# Altium PCB PCB1.PcbDoc (part 1 of 3)
Units mil, origin at the board's own origin, x right, y up, seen from the top; angles counter-clockwise.
Board outline 3543.31 x 5118.11 mil, 2 copper layers (Top Layer, Bottom Layer); 56 components, 55 nets, 300 pads, 86 vias.
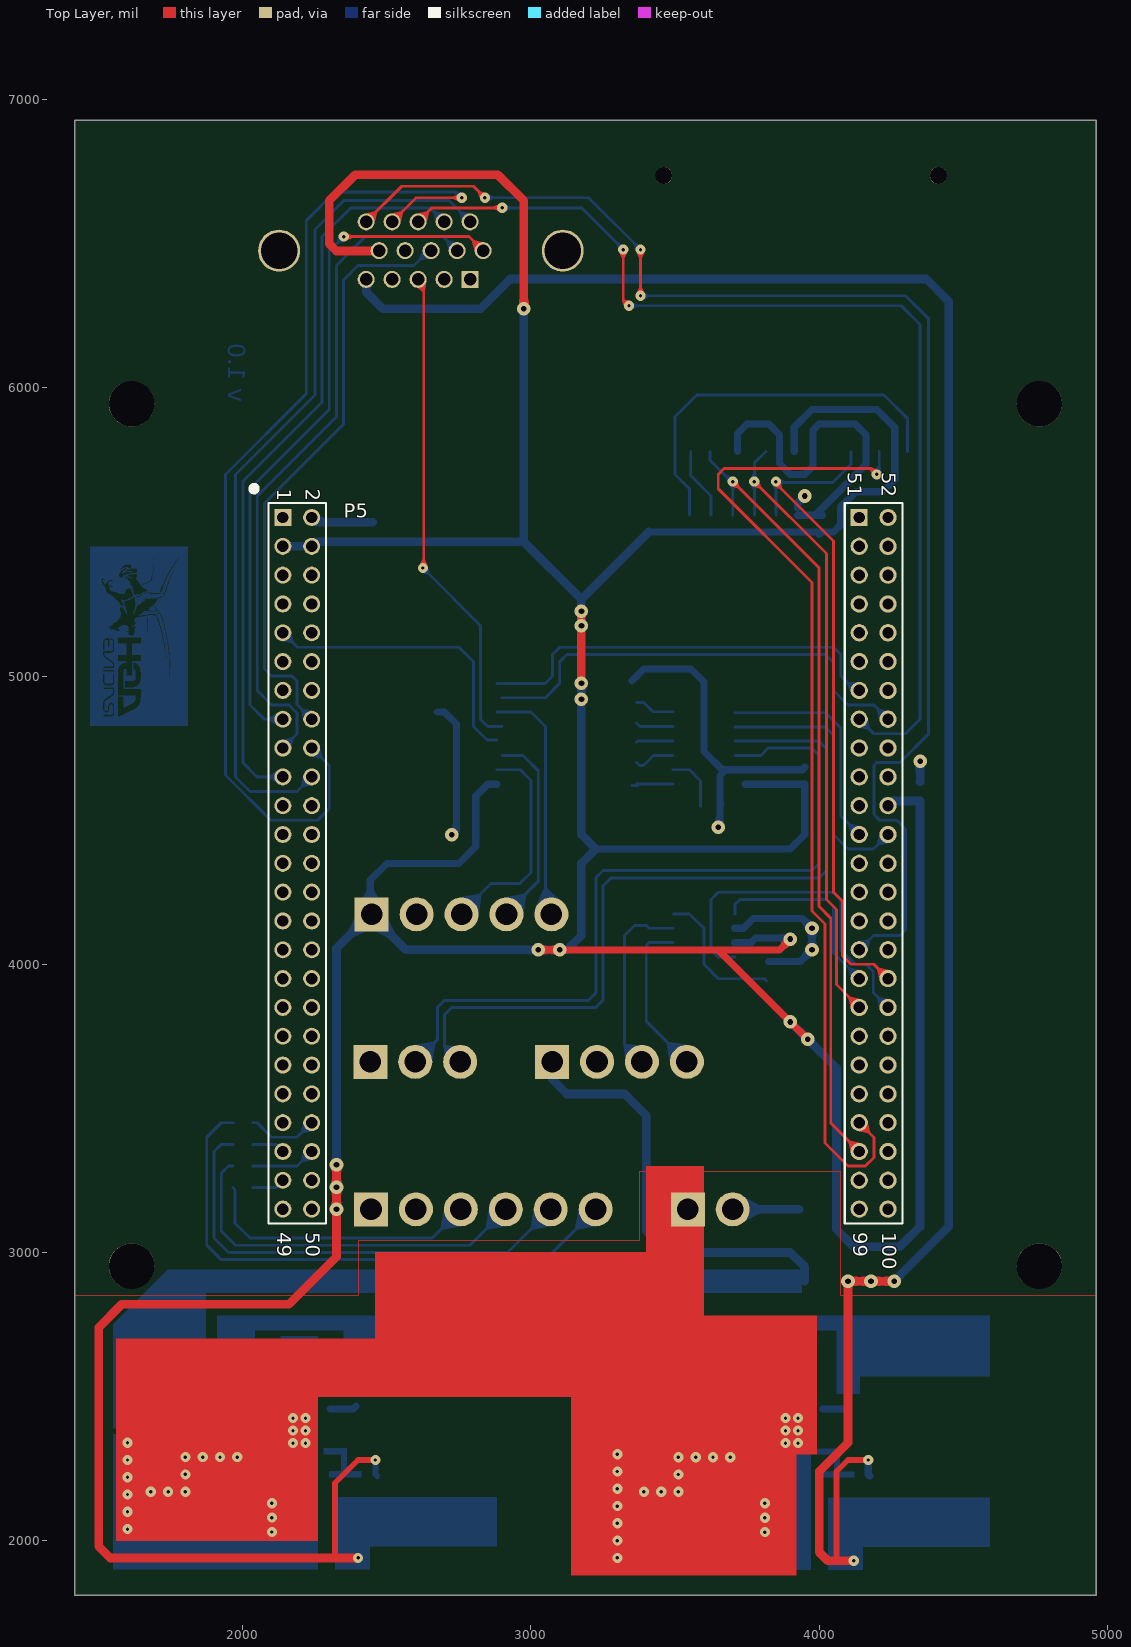
[diagram p0: Top Layer view]
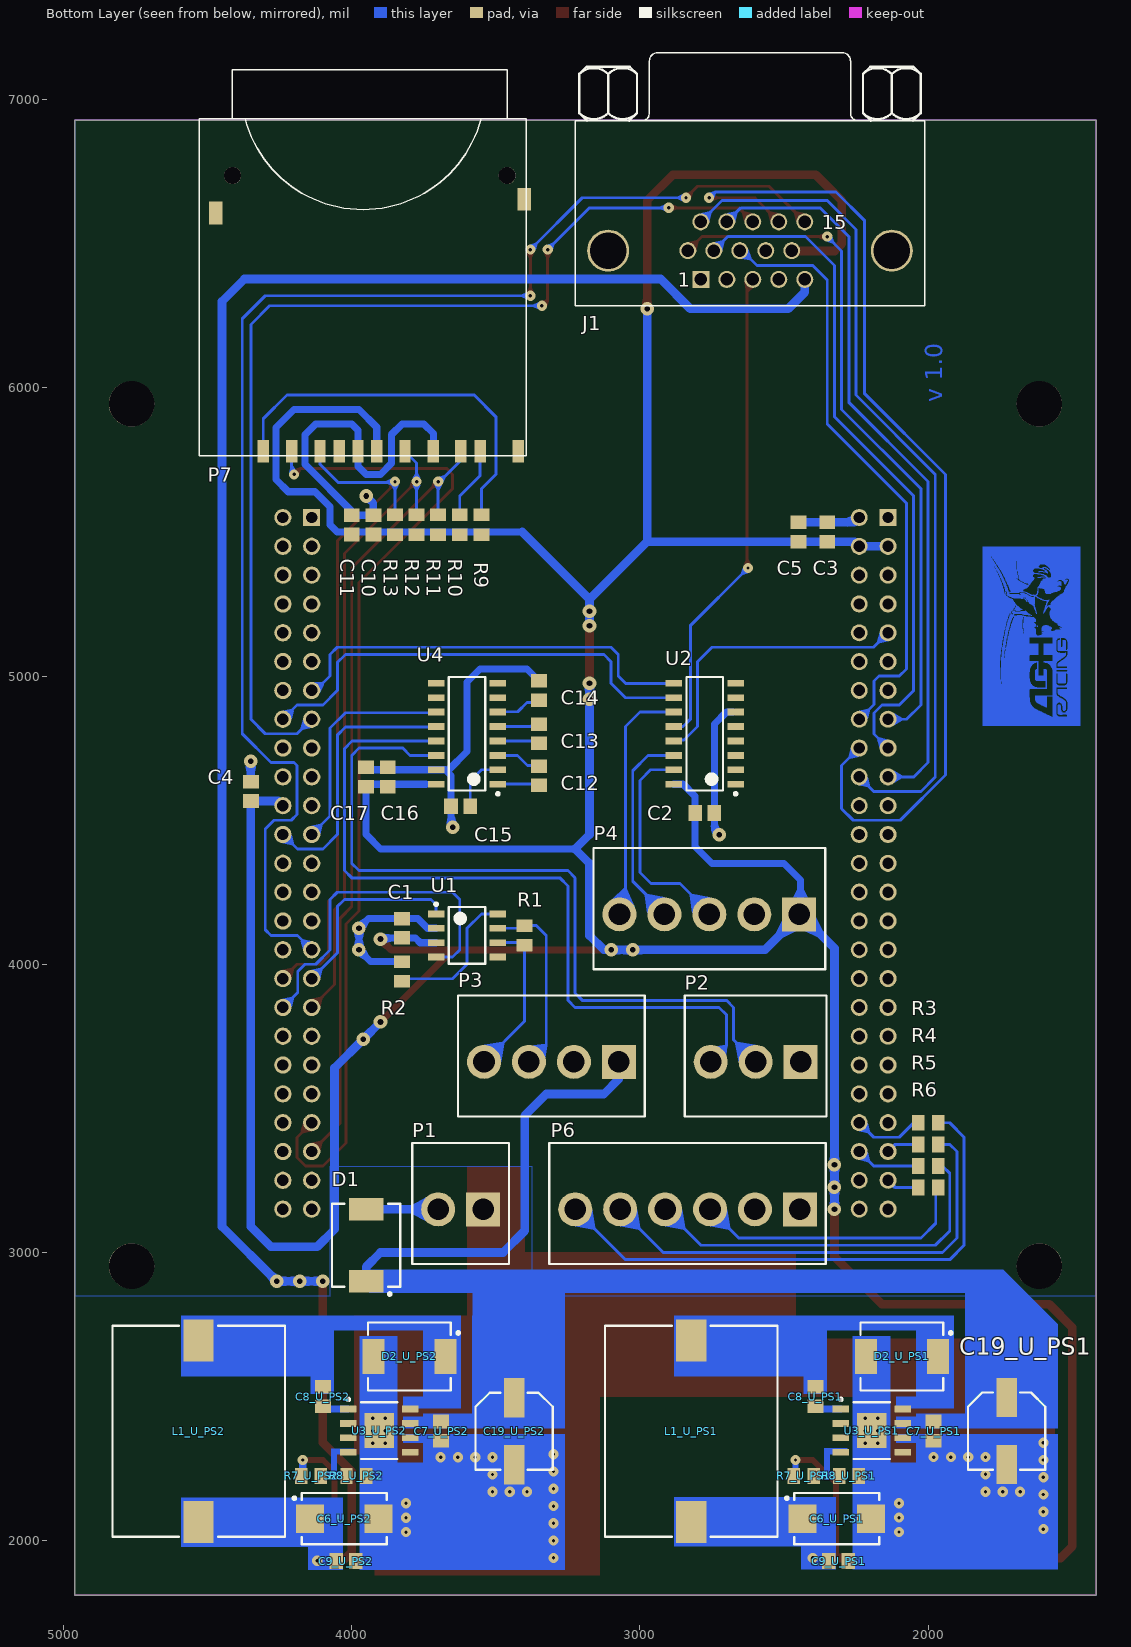
[diagram p1: Bottom Layer view, seen from below]
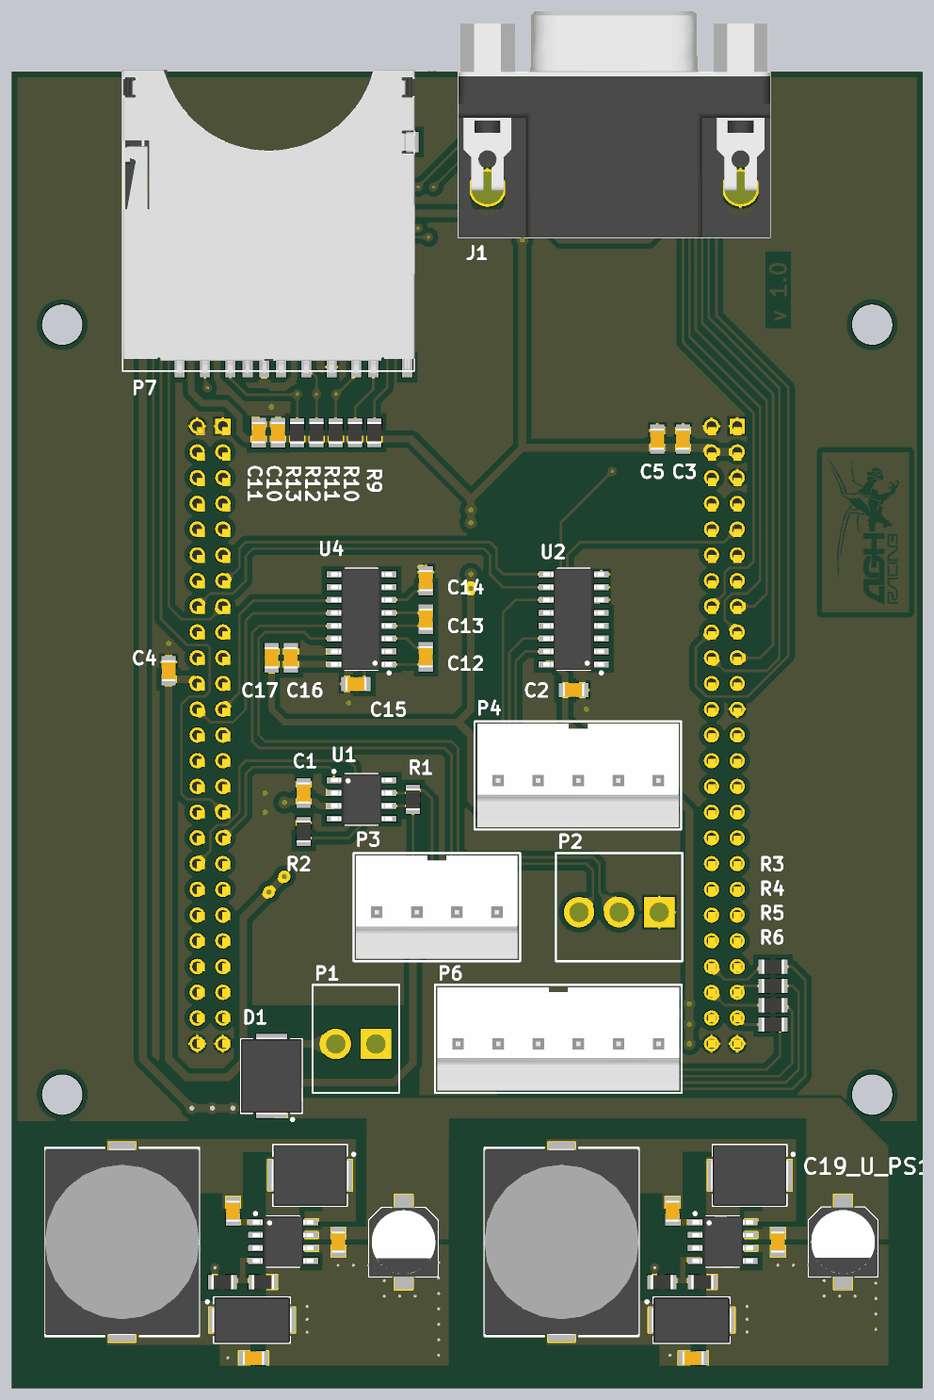
[diagram p4: 3D render of the assembled board from below, using the file's embedded part models]

## Layer stack, top to bottom
Top Solder: solder mask 0.4, Solder Resist, Dk 3.5
Top Layer: signal copper 1.4
Dielectric 1: dielectric 12.6, FR-4, Dk 4.8
Bottom Layer: signal copper 1.4
Bottom Solder: solder mask 0.4, Solder Resist, Dk 3.5

## Board outline
1417.32,1811.02 4960.63,1811.02 4960.63,6929.13 1417.32,6929.13

## Design rules (kind name [scope] priority, off if disabled: settings)
Clearance [All] p1: gap=10 except(8: SMDPad-SMDPad; 20: Arc-Poly Track-Poly SMDPad-Poly THPad-Poly Via-Poly Fill-Poly Poly-Poly)
HoleSize [All] p1: absolutevalues=TRUE maxlimit=196.85 minlimit=11.81 maxpercent=80.000 minpercent=20.000
PlaneClearance [InNet('GND')] p1: clearance=20
PolygonConnect PolygonConnect_1 [IsVia AND InNet('GND')] p1: connectstyle=Direct reliefconductorwidth=10 reliefentries=4 polygonreliefangle="90 Angle" airgapwidth=10
PolygonConnect [All] p2: connectstyle=Relief reliefconductorwidth=10 reliefentries=4 polygonreliefangle="90 Angle" airgapwidth=10
RoomDefinition U_CAN_Module [InComponentClass('U_CAN_Module')] p1: confinementstyle=ConfineIn formatcopy=TRUE lockcomponents=FALSE outline 3326.77,3900 3326.77,4330.71 4040.71,4330.71 4040.71,3900
RoomDefinition U_PS2 [InComponentClass('U_PS2')] p2: confinementstyle=ConfineIn formatcopy=TRUE lockcomponents=FALSE outline 4900,1880 3260,1880 3260,2780 4900,2780
RoomDefinition U_PS1 [InComponentClass('U_PS1')] p3: confinementstyle=ConfineIn formatcopy=TRUE lockcomponents=FALSE outline 3140,1880 1540,1880 1540,2780 3140,2780
RoomDefinition U_UART_TO_RS232 [InComponentClass('U_UART_TO_RS232')] p4: confinementstyle=ConfineIn formatcopy=TRUE lockcomponents=FALSE outline 3129.92,5039.37 4015.75,5039.37 4015.75,4325.43 3129.92,4325.43
RoomDefinition U_SD_Card_Adapter [InComponentClass('U_SD_Card_Adapter')] p5: confinementstyle=ConfineIn formatcopy=TRUE lockcomponents=FALSE outline 3267.72,7204.72 4566.93,7204.72 4566.93,5275.59 3267.72,5275.59
RoomDefinition U_Discovery [InComponentClass('U_Discovery')] p6: confinementstyle=ConfineIn formatcopy=TRUE lockcomponents=FALSE outline 1811.02,2834.65 4566.93,2834.65 4566.93,6968.5 1811.02,6968.5
RoutingVias [All] p1: holewidth=28 width=50 viastyle="Through Hole" minholewidth=11.81 minwidth=31.5 maxholewidth=196.85 maxwidth=50 useviatemplates=TRUE viatemplateguid#1={49B0258C-F5A5-454E-AF11-5DAC3A63D32B} viatemplateguid#2={72FB6E34-B7B5-406E-8E23-2B7222EC5477} viatemplateguid#3={637E6A93-6537-4104-A704-FEC00B93304C} viatemplatename#1=v90h30m0mx0 viatemplatename#2=v120h50 viatemplatename#3=v90h30
SolderMaskExpansion [All] p1: expansion=4
Width "Schematic Width Constraint_1" [InNet('NetD1_1')] p1: maxlimit=30 minlimit=20 preferedwidth=25 minimp=50.000000 maximp=50.000000 favimp=50.000000
Width "Schematic Width Constraint" [InNetClass('PowerNets')] p2: maxlimit=30 minlimit=20 preferedwidth=25 minimp=50.000000 maximp=50.000000 favimp=50.000000
Width [InNetClass('OTHERS')] p3: maxlimit=10 minlimit=10 preferedwidth=10
Width Signal_Width [InNetClass('SIGNALS')] p4: maxlimit=10 minlimit=10 preferedwidth=10
Width Power_Width [InNetClass('POWER')] p5: maxlimit=30 minlimit=20 preferedwidth=25 minimp=50.000000 maximp=50.000000 favimp=50.000000
28 further rules are at their usual default settings.

## Classes and differential pairs
net class CTRL_LED[1..3]: CTRL_LED1 CTRL_LED2 CTRL_LED3
net class PowerNets: +3V3 +5V +12V GND NetC8_U_PS1_1 NetC8_U_PS1_2 NetC8_U_PS2_1 NetC8_U_PS2_2 NetR7_U_PS1_1 NetR7_U_PS2_1
channel class PS: U_PS1 U_PS2
component class U_PS2: C6_U_PS2 C7_U_PS2 C8_U_PS2 C9_U_PS2 C19_U_PS2 D2_U_PS2 L1_U_PS2 R7_U_PS2 R8_U_PS2 U3_U_PS2
component class U_PS1: C6_U_PS1 C7_U_PS1 C8_U_PS1 C9_U_PS1 C19_U_PS1 D2_U_PS1 L1_U_PS1 R7_U_PS1 R8_U_PS1 U3_U_PS1
component class U_UART_TO_RS232: C12 C13 C14 C15 C16 C17 U4
component class U_SD_Card_Adapter: C10 C11 P7 R9 R10 R11 R12 R13
component class U_Discovery: C2 C3 C4 C5 P5 P6 R3 R4 R5 R6 U2
component class U_CAN_Module: C1 R1 R2 U1
component class Main: D1 J1 P1 P2 P3 P4

## Components (designator, comment, footprint, x,y, rotation, side; value= is the part's Value field where it differs from the comment)
C1 "Cap" CAP_0805_IPC_MD 3825,4125 r270 bottom
C2 "Cap" CAP_0805_IPC_MD 2775,4525 r0 bottom
C3 "Cap" CAP_0805_IPC_MD 2350,5500 r270 bottom
C4 "Cap" CAP_0805_IPC_MD 4350,4600 r270 bottom
C5 "Cap" CAP_0805_IPC_MD 2450,5500 r270 bottom
C6_U_PS1 "Cap Pol" CAP_SMD_D_IPC_MD 2316.81,2076.53 r180 bottom (schematic designator C6)
C6_U_PS2 "Cap Pol" CAP_SMD_D_IPC_MD 4026.02,2076.53 r180 bottom (schematic designator C6)
C7_U_PS1 "Cap" CAP_0805_IPC_MD 1980.79,2380 r90 bottom (schematic designator C7)
C7_U_PS2 "Cap" CAP_0805_IPC_MD 3690,2380 r90 bottom (schematic designator C7)
C8_U_PS1 "Cap" CAP_0805_IPC_MD 2390.79,2500 r90 bottom (schematic designator C8)
C8_U_PS2 "Cap" CAP_0805_IPC_MD 4100,2500 r90 bottom (schematic designator C8)
C9_U_PS1 "Cap" CAP_0805_IPC_MD 2310.79,1928.72 r0 bottom (schematic designator C9)
C9_U_PS2 "Cap" CAP_0805_IPC_MD 4020,1928.72 r0 bottom (schematic designator C9)
C10 "Cap" CAP_0805_IPC_MD 3925,5525 r270 bottom
C11 "Cap" CAP_0805_IPC_MD 4000,5525 r270 bottom
C12 "Cap" CAP_0805_IPC_MD 3350,4654.16 r270 bottom
C13 "Cap" CAP_0805_IPC_MD 3350,4800 r270 bottom
C14 "Cap" CAP_0805_IPC_MD 3350,4950 r270 bottom
C15 "Cap" CAP_0805_IPC_MD 3622.05,4548.43 r180 bottom
C16 "Cap" CAP_0805_IPC_MD 3875,4650 r270 bottom
C17 "Cap" CAP_0805_IPC_MD 3950,4650 r270 bottom
C19_U_PS1 "Cap Pol" CAPAE7866X80M 1727.43,2380 r270 bottom (schematic designator C19)
C19_U_PS2 "Cap Pol" CAPAE7866X80M 3436.64,2379.61 r270 bottom (schematic designator C19)
D1 "SK33" DO214AB_IPC_MD 3950,3025 r270 bottom
D2_U_PS1 "SK33" DO214AB_IPC_MD 2090.79,2639.07 r180 bottom (schematic designator D2)
D2_U_PS2 "SK33" DO214AB_IPC_MD 3800,2639.07 r180 bottom (schematic designator D2)
J1 "D-SUB 15" Dsub-3H15 2618.11,6476.38 r180 bottom
L1_U_PS1 "Inductor" IND_DL50_IPC_MD 2821.9,2380 r270 bottom (schematic designator L1)
L1_U_PS2 "Inductor" IND_DL50_IPC_MD 4531.11,2380 r270 bottom (schematic designator L1)
P1 "POWER" HDR_1x2_3_94_LOCKING 3622.05,3149.61 r0 bottom
P2 "EMU" HDR_1x3_3_94_LOCKING 2598.43,3661.42 r0 bottom locked
P3 "CAN" HDR_1x4_3_94_LOCKING 3307.09,3661.42 r0 bottom locked
P4 "STEERING WHEEL" HDR_1x5_3_94_LOCKING 3070.87,4173.23 r0 bottom
P5 "STM32F4DISCOVERY" DISCOVERY_F4 3188.98,4350.39 r0 top locked
P6 "CONTROL LEDS" HDR_1x6_3_94_LOCKING 2834.65,3149.61 r0 bottom locked
P7 "SD Card Connector" 693061010911 3937.01,6258.43 r0 bottom locked
R1 "Res" RES_0805_IPC_MD 3400,4100 r90 bottom
R2 "Res" RES_0805_IPC_MD 3825,3975 r270 bottom
R3 "Res" RES_0805_IPC_MD 2000,3450 r180 bottom
R4 "Res" RES_0805_IPC_MD 2000,3375 r180 bottom
R5 "Res" RES_0805_IPC_MD 2000,3300 r180 bottom
R6 "Res" RES_0805_IPC_MD 2000,3225 r180 bottom
R7_U_PS1 "Res" RES_0805_IPC_MD 2431.97,2224.33 r0 bottom (schematic designator R7)
R7_U_PS2 "Res" RES_0805_IPC_MD 4141.18,2224.33 r0 bottom (schematic designator R7)
R8_U_PS1 "Res" RES_0805_IPC_MD 2274.49,2224.33 r0 bottom (schematic designator R8)
R8_U_PS2 "Res" RES_0805_IPC_MD 3983.7,2224.33 r0 bottom (schematic designator R8)
R9 "Res" RES_0805_IPC_MD 3550,5525 r270 bottom
R10 "Res" RES_0805_IPC_MD 3625,5525 r270 bottom
R11 "Res" RES_0805_IPC_MD 3700,5525 r270 bottom
R12 "Res" RES_0805_IPC_MD 3775,5525 r270 bottom
R13 "Res" RES_0805_IPC_MD 3850,5525 r270 bottom
U1 "SN65HVD230D" SOIC_8_IPC_MD 3600,4100 r180 bottom
U2 "CD74HC4052" SO_16_IPC_MD 2775,4800 r0 bottom
U3_U_PS1 "TPS5430" SOIC_8_THERMAL_PAD_IPC_MD 2195.75,2381.81 r180 bottom (schematic designator U3)
U3_U_PS2 "TPS5430" SOIC_8_THERMAL_PAD_IPC_MD 3904.96,2381.81 r180 bottom (schematic designator U3)
U4 "MAX232IDW" SO_16_IPC_MD 3600,4800 r0 bottom

## Footprints (in the part's own frame and the unit in brackets; to place one, negate y for a bottom-side part, rotate by r counter-clockwise, add the part's x,y. Pads: shape width x height; smd on the part's side, far side on the other; paste and mask are expansions set on the pad)
693061010911 [mm] "WR-CRD SD_Push and Push_with card detection_9 pins"
  rect 1x2 smd: 1(6.9,12.155) 2(4.4,12.155) 3(1.05,12.155) 4(-0.6,12.155) 5(-3.1,12.155) 6(-5.6,12.155) 7(-8.02,12.155) 8(-9.72,12.155) 9(9.4,12.155) CD(2.7,12.155) WP(-13.07,12.155)
  rect 1.2x2 smd: Z1(-13.6,-10.055) Z2(13.6,-8.855)
  round 1.5 hole 1.5 unplated: ""(-12.1,-12.155) ""(12.1,-12.155)
  silkscreen extent -13.77,-21.5 15.03,12.54, body extent -13.8,-17.16 15,12.74, height 3.06
CAP_0805_IPC_MD [mm] "Chip Capacitor, 2-Leads, 0805, SAMSUNG, IPC Medium Density"
  rect 1.2x1.4 smd: 1(-0.85,0) 2(0.85,0)
  body extent -1.05,-0.67 1.05,0.67, height 1.35
CAP_SMD_D_IPC_MD [mm] "Capacitor SMD D, IPC Medium Density"
  rect 2.45x2.5 smd: 1(-3.025,0) 2(3.025,0)
  silkscreen extent -4.53,-2.25 3.75,2.25, body extent -3.97,-2.25 3.97,2.25, height 3.1
CAPAE7866X80M [mm] "Aluminum Electrolytic Capacitor, Body 6,60x6,60x8,00mm, IPC Low Density"
  rect 3.45x1.8 smd: 1(-2.95,0) 2(2.95,0)
  silkscreen extent -3.4,-3.4 3.4,3.4, body extent -3.9,-3.4 3.9,3.4, height 8
DISCOVERY_F4 [mm] "Connector; Header; 25x2 Position"
  rect 1.5x1.5 hole 1: 1(-26.67,30.48) 51(24.13,30.48)
  round 1.5 hole 1: 2(-24.13,30.48) 3(-26.67,27.94) 4(-24.13,27.94) 5(-26.67,25.4) 6(-24.13,25.4) 7(-26.67,22.86) 8(-24.13,22.86) 9(-26.67,20.32) 10(-24.13,20.32) 11(-26.67,17.78) 12(-24.13,17.78) 13(-26.67,15.24) 14(-24.13,15.24) 15(-26.67,12.7) 16(-24.13,12.7) 17(-26.67,10.16) 18(-24.13,10.16) 19(-26.67,7.62) 20(-24.13,7.62) 21(-26.67,5.08) 22(-24.13,5.08) 23(-26.67,2.54) 24(-24.13,2.54) 25(-26.67,0) 26(-24.13,0) 27(-26.67,-2.54) 28(-24.13,-2.54) 29(-26.67,-5.08) 30(-24.13,-5.08) 31(-26.67,-7.62) 32(-24.13,-7.62) 33(-26.67,-10.16) 34(-24.13,-10.16) 35(-26.67,-12.7) 36(-24.13,-12.7) 37(-26.67,-15.24) 38(-24.13,-15.24) 39(-26.67,-17.78) 40(-24.13,-17.78) 41(-26.67,-20.32) 42(-24.13,-20.32) 43(-26.67,-22.86) 44(-24.13,-22.86) 45(-26.67,-25.4) 46(-24.13,-25.4) 47(-26.67,-27.94) 48(-24.13,-27.94) 49(-26.67,-30.48) 50(-24.13,-30.48) 52(26.67,30.48)
  round 1.524 hole 1: 53(24.13,27.94) 54(26.67,27.94) 55(24.13,25.4) 56(26.67,25.4) 57(24.13,22.86) 58(26.67,22.86) 59(24.13,20.32) 60(26.67,20.32) 61(24.13,17.78) 62(26.67,17.78) 63(24.13,15.24) 64(26.67,15.24) 65(24.13,12.7) 66(26.67,12.7) 67(24.13,10.16) 68(26.67,10.16) 69(24.13,7.62) 70(26.67,7.62) 71(24.13,5.08) 72(26.67,5.08) 73(24.13,2.54) 74(26.67,2.54) 75(24.13,0) 76(26.67,0) 77(24.13,-2.54) 78(26.67,-2.54) 79(24.13,-5.08) 80(26.67,-5.08) 81(24.13,-7.62) 82(26.67,-7.62) 83(24.13,-10.16) 84(26.67,-10.16) 85(24.13,-12.7) 86(26.67,-12.7) 87(24.13,-15.24) 88(26.67,-15.24) 89(24.13,-17.78) 90(26.67,-17.78) 91(24.13,-20.32) 92(26.67,-20.32) 93(24.13,-22.86) 94(26.67,-22.86) 95(24.13,-25.4) 96(26.67,-25.4) 97(24.13,-27.94) 98(26.67,-27.94) 99(24.13,-30.48) 100(26.67,-30.48)
  silkscreen extent -29.46,-31.75 27.94,33.27, body extent -32.77,-36.99 32.73,65.58, height 17.5
DO214AB_IPC_MD [mm] "Molded Diode, DO214AB, Diotec Semiconductor, IPC Medium Density"
  rect 1.95x3.05 smd: 1(-3.175,0) 2(3.175,0)
  silkscreen extent -3.65,-3 4.42,3, body extent -3.85,-3 3.85,3, height 2.5
Dsub-3H15 [mm] "Dsub 15 pins, right angled"
  rect 1.5x1.5 hole 1.1: 1(-4.33,-2.54)
  round 1.5 hole 1.1: 2(-2.04,-2.54) 3(0.25,-2.54) 4(2.54,-2.54) 5(4.83,-2.54) 6(-5.475,0) 7(-3.185,0) 8(-0.895,0) 9(1.395,0) 10(3.685,0) 11(-4.33,2.54) 12(-2.04,2.54) 13(0.25,2.54) 14(2.54,2.54) 15(4.83,2.54)
  round 3.7 hole 3.2: 16(12.5,0) 17(-12.5,0)
  silkscreen extent -15.4,-4.87 15.4,17.43, body extent -15.4,-4.86 15.4,17.44, height 12.51
HDR_1x2_3_94_LOCKING [mm]
  rect 3x3 hole 1.9: 1(-1.98,0)
  round 3 hole 1.9: 2(1.98,0)
  silkscreen extent -4.27,-5.84 4.27,4.83
HDR_1x3_3_94_LOCKING [mm]
  rect 3x3 hole 1.9: 1(-3.96,0)
  round 3 hole 1.9: 2(0,0) 3(3.96,0)
  silkscreen extent -6.25,-5.84 6.25,4.83
HDR_1x4_3_94_LOCKING [mm]
  rect 3x3 hole 1.9: 1(-5.94,0)
  round 3 hole 1.9: 2(-1.98,0) 3(1.98,0) 4(5.94,0)
  silkscreen extent -8.23,-5.84 8.23,4.83, body extent -7.97,-5.6 7.98,4.6, height 13.85
HDR_1x5_3_94_LOCKING [mm]
  rect 3x3 hole 1.9: 1(-15.84,0)
  round 3 hole 1.9: 2(-11.88,0) 3(-7.92,0) 4(-3.96,0) 5(0,0)
  silkscreen extent -18.13,-5.84 2.29,4.83, body extent -17.92,-5.6 1.99,4.6, height 13.85
HDR_1x6_3_94_LOCKING [mm]
  rect 3x3 hole 1.9: 1(-9.9,0)
  round 3 hole 1.9: 2(-5.94,0) 3(-1.98,0) 4(1.98,0) 5(5.94,0) 6(9.9,0)
  silkscreen extent -12.19,-5.84 12.19,4.83, body extent -11.93,-5.6 11.94,4.6, height 13.85
IND_DL50_IPC_MD [mm] "DL50, Inductor, Ferrocore, IPC Medium Density"
  rect 3.7x2.65 smd: 1(-8,0) 2(8,0)
  silkscreen extent -9.3,-7.6 9.3,7.6, body extent -9.18,-7.62 9.18,7.62, height 7.21
RES_0805_IPC_MD [mm] "Chip Resistor, 2-Leads, 0805, Royal Ohm, IPC Medium Density"
  rect 1.1x1.4 smd: 1(-0.875,0) 2(0.875,0)
  body extent -1.07,-0.7 1.07,0.7, height 0.65
SO_16_IPC_MD [mm] "SO, 16-Leads, Pitch 1,27mm, IPC Medium Density"
  rect 1.45x0.6 smd: 1(-2.725,4.445) 2(-2.725,3.175) 3(-2.725,1.905) 4(-2.725,0.635) 5(-2.725,-0.635) 6(-2.725,-1.905) 7(-2.725,-3.175) 8(-2.725,-4.445) 9(2.725,-4.445) 10(2.725,-3.175) 11(2.725,-1.905) 12(2.725,-0.635) 13(2.725,0.635) 14(2.725,1.905) 15(2.725,3.175) 16(2.725,4.445)
  silkscreen extent -2.85,-5 1.6,5.42, body extent -3,-5 3,5, height 1.75
SOIC_8_IPC_MD [mm] "SOIC, 8-Leads, Pitch 1,27mm, IPC Medium Density"
  rect 1.45x0.6 smd: 1(-2.725,1.905) 2(-2.725,0.635) 3(-2.725,-0.635) 4(-2.725,-1.905) 5(2.725,-1.905) 6(2.725,-0.635) 7(2.725,0.635) 8(2.725,1.905)
  silkscreen extent -2.85,-2.5 1.6,2.88, body extent -3,-2.5 3,2.5, height 1.75
SOIC_8_THERMAL_PAD_IPC_MD [mm] "SOIC, 8-Leads, Thermal Pad 3,10x2,60mm, IPC Medium Density"
  rect 1.45x0.6 smd: 1(-2.725,1.905) 2(-2.725,0.635) 3(-2.725,-0.635) 4(-2.725,-1.905) 5(2.725,-1.905) 6(2.725,-0.635) 7(2.725,0.635) 8(2.725,1.905)
  rect 2.6x3.1 smd: 9(0,0)
  silkscreen extent -2.85,-2.5 1.6,2.88, body extent -3,-2.5 3,2.5, height 1.75

## Part data
C1 C2 C3 C4 C5 C7_U_PS1 C7_U_PS2 C8_U_PS1 C8_U_PS2 C9_U_PS1 C9_U_PS2 C10 C11 C12 C13 C14 C15 C16 C17: "Capacitor"
C6_U_PS1 C6_U_PS2 C19_U_PS1 C19_U_PS2: "Polarized Capacitor (Axial)"
D1 D2_U_PS1 D2_U_PS2: "Schottky Diode"
J1: "Receptacle Assembly, 15-Pin, Sim Line Connector"
P1: library part "Header 2", "Header, 2-Pin"
P2: library part MHDR1X3, "ST1212 3 pin waterproof connector"
P3: library part "Header 4", "Header, 4-Pin"
P4: library part "Header 5", "Header, 5-Pin"
P5: "STM32F4DISCOVERY connector for shield"
P6: library part "Header 6", "Header, 6-Pin"
P7: "WR-CRD SD_Push and Push"
R1 R2 R3 R4 R5 R6 R7_U_PS1 R7_U_PS2 R8_U_PS1 R8_U_PS2 R9 R10 R11 R12 R13: "Resistor"
U1: library part SN65HVD230DR, "3.3V CAN Transceiver with Standby Mode, 17 mA, -40 to 85 degC, 8-pin SOIC (D), Green (RoHS & no Sb/Br)"
U2: "MUX/DEMUX"
U3_U_PS1 U3_U_PS2: "3-A, Wide Input Range, Step-Down Converter"
U4: "Dual EIA-232 Driver / Receiver, -40 to 85 degC, 16-Pin SOIC (DW), Green (RoHS & no Sb/Br)"

## Free pads (board coordinates)
  round 157.48 hole 157.48 unplated: 1(1614.17,2952.76) 1(1614.17,5944.88) 1(4763.78,2952.76) 1(4763.78,5944.88)

## Via types
v1: diameter 35.43/35.43 (per signal layer), hole 11.81, Top Layer to Bottom Layer, tented both sides, 52 vias
v2: diameter 47.24/47.24 (per signal layer), hole 19.68, Top Layer to Bottom Layer, tented both sides, 19 vias
v3: diameter 35.43, hole 11.81, Top Layer to Bottom Layer, tented top, 12 vias
v4: diameter 47.24/47.24 (per signal layer), hole 19.68, Top Layer to Bottom Layer, 3 vias

## Nets (pads, with @x,y where several pads share a name; then routed paths per layer and width w, separated by ;. In a path a pad name is that pad's centre, name@x,y a point inside that pad or via, vN(x,y) a via of type N, cw(c..) or ccw(c..) an arc to the next point about the centre after c; other vN are vias at no path point)
+3V3: C1.2 C2.2 C3.2 C4.2 C5.2 C6_U_PS1.1 C9_U_PS1.2 C10.2 C11.2 C16.2 C17.2 J1.10 L1_U_PS1.2 P4.1 P5.3 P5.4 P5.72 P7.4 R7_U_PS1.2 R9.2 R10.2 R11.2 R12.2 R13.2 U1.3 U2.16 U4.16 | length 18173.6
  Top Layer w20: 2320,1940 2320,2200 2400,2280 v1(2460,2280)
  Top Layer w25: v2(3025,4050) v2(3100,4050) 3650,4050 ; v2(3900,4087.5) 3862.5,4050 3650,4050 ; v4(3960,3740) v4(3900,3800) 3650,4050
  Top Layer w30: v2(2325,3304.92) v2(2325,3226.18) v2(2325,3150) 2325,2985 2160,2820 1580,2820 1500,2740 1500,1980 1540,1940 v1(2400,1940) ; J1.10@2475,6475 2325,6475 2300,6500 2300,6650 2390,6740 2885,6740 2975,6650 v2(2975,6275) ; v2(3175,4975) v2(3175,5175) v2(3175,5225)
  Bottom Layer w20: v1(2460,2280) 2460,2230.75 R7_U_PS1.2@2466.42,2224.33
  Bottom Layer w25: P4.1@2442.52,4173.23 2442.52,4292.52 2500,4350 2750,4350 2808.46,4408.46 2808.46,4583.46 2850,4625 U2.16@2882.28,4625 ; L1_U_PS1.2@2786.3,2066.85 L1_U_PS1.2@2825.67,2027.48 ; 3225,4400 3900,4400 3950,4450 3950,4625 3742.72,4625 ; 3408.46,5500 3991.54,5500 C11.2@4000,5491.54 4008.46,5500 4050,5500 4075,5525 4075,5587.5 4127.5,5640 4220,5640 4262.5,5682.5 4262.5,5862.5 4200,5925 3975,5925 3913.39,5863.39 P7.4@3913.39,5779.88 ; U1.3@3707.28,4075 3762.5,4075 3779.04,4091.54 C1.2@3820.51,4091.54 ; C1.2@3825,4091.54 3895.96,4091.54 v2(3900,4087.5)
  Bottom Layer w30: P5.3@2138.98,5450.39 P5.4@2238.98,5450.39 2255.12,5466.54 C3.2@2350,5466.54 C5.2@2450,5466.54 2975,5466.54 ; v2(2325,3150) v2(2325,3226.18) v2(2325,3304.92) 2325,4055.71 P4.1@2442.52,4173.23 ; P4.1@2442.52,4142.52 P4.1@2442.52,4173.23 ; v2(2975,6275) 2975,5466.54 ; v2(3175,4975) 3175,4450 3225,4400 3175,4350 3175,4100 3125,4050 v2(3100,4050) v2(3025,4050) 2565.75,4050 P4.1@2442.52,4173.23 ; v2(3175,5175) v2(3175,5225) 3175,5266.54 ; 3408.46,5500 3175,5266.54 ; v4(3900,3800) v4(3960,3740) 4060,3640 4060,3080 4120,3020 4280,3020 4350,3090 C4.2@4350,4566.54 4255.12,4566.54 P5.72@4238.98,4550.39 ; 2975,5466.54 3175,5266.54
  other v4: 3175,4920
+5V: C6_U_PS2.1 C9_U_PS2.2 J1.5 L1_U_PS2.2 R7_U_PS2.2 | length 7627.7
  Top Layer w20: 4060,1930 4060,2240 4100,2280 v1(4170,2280)
  Top Layer w30: v1(4120,1930) 4060,1930 4030,1930 4000,1960 4000,2240 4100,2340 v2(4100,2900) v2(4180,2900) v2(4260,2900)
  Bottom Layer w25: v1(4170,2280) 4170,2229.96 R7_U_PS2.2@4175.63,2224.33 ; L1_U_PS2.2@4495.51,2066.85 L1_U_PS2.2@4534.88,2027.48
  Bottom Layer w30: J1.5@2427.95,6376.38 2427.95,6332.05 2485,6275 2825,6275 2927.95,6377.95 4372.05,6377.95 4450,6300 4450,3090 v2(4260,2900) v2(4180,2900) v2(4100,2900)
+12V: C7_U_PS1.2 C7_U_PS2.2 C19_U_PS1.1 C19_U_PS2.1 D1.2 P3.1 U3_U_PS1.7 U3_U_PS2.7 | length 1490.7
  Bottom Layer w30: P3.1@3073.23,3661.42 3073.23,3601.77 3125,3550 3325,3550 3400,3475 3400,3075 3475,3000 3900,3000 3950,2950 D1.2@3950,2900
BLUE_LED: P5.47 R6.1 | length 115
  Bottom Layer w10: R6.1@2034.45,3225 2113.58,3225 P5.47@2138.98,3250.39
BUT_1: J1.14 P5.18 | length 3584.4
  Top Layer w10: J1.14@2518.12,6576.38 2600.87,6659.13 2600,6660 v1(2760,6660)
  Bottom Layer w10: P5.18@2238.98,4750.39 2300,4689.37 2300,4540 2260,4500 2096.72,4500 1940,4656.72 1940,5700 2220,5980 2220,6580 2320,6680 2740,6680 v1(2760,6660)
BUT_2: J1.15 P5.81 | length 4803.6
  Top Layer w10: J1.15@2427.96,6576.38 2551.58,6700 2800,6700 v1(2840,6660) ; v1(3380,6320) v1(3380,6480)
  Bottom Layer w10: v1(2840,6660) 3200,6660 v1(3380,6480) ; v1(3380,6320) 4300,6320 4380,6240 4380,4800 4280,4700 4200,4700 4190,4690 4190,4520 4210,4500 4270,4500 4300,4470 4300,4120 4280,4100 4188.58,4100 P5.81@4138.98,4050.39
CAN1_RX: P5.86 U1.4 | length 1202.8
  Bottom Layer w10: U1.4@3707.28,4025 3650,4025 3625,4050 3625,4225 3650,4250 4050,4250 4075,4225 4075,4050 4125,4000 4162.5,4000 4187.5,3975 4187.5,3901.87 P5.86@4238.98,3850.39
CAN1_TX: P5.83 U1.1 | length 679.2
  Bottom Layer w10: U1.1@3707.28,4175 3707.28,4207.28 3725,4225 4025,4225 4050,4200 4050,4039.37 P5.83@4138.98,3950.39
CANH: P3.3 R1.2 U1.7 | length 649.4
  Bottom Layer w10: P3.3@3385.04,3661.42 3325,3721.46 3325,4100 3359.45,4134.45 R1.2@3400,4134.45 3409.45,4125 U1.7@3492.72,4125
CANL: P3.4 R1.1 U1.6 | length 559.1
  Bottom Layer w10: U1.6@3492.72,4075 3409.45,4075 R1.1@3400,4065.55 3400,3802.36 P3.4@3540.94,3661.42
CTRL_LED1: P4.4 U2.14 | length 693.2
  Bottom Layer w10: U2.14@2900,4725 2971.85,4725 3025,4671.85 3025,4287.99 P4.4@2910.24,4173.23
CTRL_LED2: P4.3 U2.15 | length 758
  Bottom Layer w10: P4.3@2754.33,4173.23 2861.1,4280 2961.1,4280 3000,4318.9 3000,4637.8 2962.8,4675 U2.15@2882.28,4675
CTRL_LED3: P4.5 U2.11 | length 846.9
  Bottom Layer w10: U2.11@2882.28,4875 3000,4875 3050,4825 3050,4189.37 P4.5@3066.14,4173.23
GDISP_CS: J1.13 P5.65 | length 3654.8
  Top Layer w10: J1.13@2608.27,6576.38 2656.89,6625 v1(2900,6625) ; v1(3320,6480) 3320,6305 v1(3340,6285)
  Bottom Layer w10: v1(2900,6625) 3175,6625 v1(3320,6480) ; v1(3340,6285) 4285,6285 4350,6220 4350,4850 4300,4800 4189.37,4800 P5.65@4138.98,4850.39
GND: C1.1 C2.1 C3.1 C4.1 C5.1 C6_U_PS1.2 C6_U_PS2.2 C7_U_PS1.1 C7_U_PS2.1 C9_U_PS1.1 C9_U_PS2.1 C10.1 C11.1 C14.1 C15.1 C16.1 C17.1 C19_U_PS1.2 C19_U_PS2.2 D2_U_PS1.1 D2_U_PS2.1 J1.1 J1.2 J1.4 J1.9 J1.16 J1.17 P1.1 P2.1 P3.2 P4.2 P5.1 P5.2 P5.5 P5.23 P5.49 P5.50 P5.51 P5.52 P5.99 P5.100 P6.1 P6.2 P7.3 P7.6 R2.1 R8_U_PS1.1 R8_U_PS2.1 U1.2 U2.6 U2.7 U2.8 U3_U_PS1.6 U3_U_PS1.9 U3_U_PS2.6 U3_U_PS2.9 U4.15 | length 3733.6
  Bottom Layer w20: P5.1@2122.05,5533.46 P5.1@2138.98,5550.39 ; C15.1@3655.51,4548.43 C15.1@3661.42,4554.33 ; v2@4350,4704.33 v2(4350.39,4704.72)
  Bottom Layer w25: U2.6@2675,4875 2700,4875 2741.54,4833.46 2741.54,4466.54 v2(2725,4450) ; C14.1@3350,4983.46 3391.54,5025 3555,5025 3600,4980 3600,4738.74 3663.74,4675 ; v2(3650,4475) 3655.51,4480.51 C15.1@3655.51,4548.43 3655.51,4655.51 3675,4675 U4.15@3707.28,4675 3941.54,4675 C17.1@3950,4683.46 ; U1.2@3707.28,4125 3737.5,4125 3770.96,4158.46 3941.54,4158.46 v2(3975,4125) v2(3975,4050) 3934.45,4009.45 R2.1@3825,4009.45 ; P7.6@3716.54,5779.88 3716.54,5841.54 3750,5875 3825,5875 3862.5,5837.5 3862.5,5737.5 3900,5700 3950,5700 3978.35,5728.35 3978.35,5853.35 4000,5875 4125,5875 4162.5,5837.5 4162.5,5734.98 C11.1@3992.99,5565.47 ; C10.1@3925,5558.46 C11.1@4010.99,5558.46 ; 3925,5583.46 3925,5600 v2(3950,5625)
  Bottom Layer w30: P5.2@2238.98,5550.39 2255.91,5533.46 C5.1@2450,5533.46 ; C4.1@4350,4633.46 4350.39,4633.86 v2(4350.39,4704.72)
  other v1: 3300,1940 3300,2000 2100.79,2030 3811.65,2029.61 1600,2040 3300,2060 2100.79,2080 3811.65,2079.61 1600,2100 3300,2120 2100.79,2130 3811.65,2129.61 1600,2160 1680.79,2170 1740.79,2170 1800.79,2170 3391.65,2169.61 3451.65,2169.61 3511.65,2169.61 3300,2180 1600,2220 1800.79,2230 3511.65,2229.61 3300,2240 1600,2280 1800.79,2290 1860.79,2290 1920.79,2290 1980.79,2290 3511.65,2289.61 3571.65,2289.61 3631.65,2289.61 3691.65,2289.61 3300,2300 1600,2340
  other v3: 2174.09,2338.5 2217.4,2338.5 3883.31,2338.5 3926.61,2338.5 2174.09,2381.81 2217.4,2381.81 3883.31,2381.81 3926.61,2381.81 2174.09,2425.12 2217.4,2425.12 3883.31,2425.12 3926.61,2425.12
GREEN_LED: P5.44 R3.1 | length 246.1
  Bottom Layer w10: R3.1@2034.45,3450 2050,3450 2100,3400 2188.58,3400 P5.44@2238.98,3450.39
MULTI_1: P5.66 U2.10 | length 1594.7
  Bottom Layer w10: U2.10@2900,4925 3050,4925 3100,4975 3100,5050 3125,5075 4021.72,5075 4050,5046.72 4050,4950 4100,4900 4189.37,4900 P5.66@4238.98,4850.39
MULTI_2: P5.63 U2.9 | length 1458.3
  Bottom Layer w10: U2.9@2882.28,4975 3050,4975 3075,5000 3075,5075 3100,5100 4050,5100 4075,5075 4075,5000 4124.61,4950.39 P5.63@4138.98,4950.39
NetC8_U_PS1_1: C8_U_PS1.1 U3_U_PS1.1 | length 93.6
  Bottom Layer w25: U3_U_PS1.1@2303.03,2456.81 2382.95,2456.81 C8_U_PS1.1@2392.6,2466.46
NetC8_U_PS1_2: C8_U_PS1.2 D2_U_PS1.2 L1_U_PS1.1 U3_U_PS1.8
NetC8_U_PS2_1: C8_U_PS2.1 U3_U_PS2.1 | length 93.6
  Bottom Layer w25: U3_U_PS2.1@4012.24,2456.81 4092.16,2456.81 C8_U_PS2.1@4101.81,2466.46
NetC8_U_PS2_2: C8_U_PS2.2 D2_U_PS2.2 L1_U_PS2.1 U3_U_PS2.8
NetC12_1: C12.1 U4.3 | length 145.2
  Bottom Layer w10: C12.1@3366.14,4700 3376.14,4690 3390,4690 3425,4725 U4.3@3492.72,4725
NetC12_2: C12.2 U4.1 | length 153.1
  Bottom Layer w10: C12.2@3350,4620.7 3370.84,4620.7 3366.54,4625 U4.1@3492.72,4625
NetC13_1: C13.1 U4.5 | length 131.9
  Bottom Layer w10: C13.1@3366.14,4837.79 3378.94,4825 U4.5@3492.72,4825
NetC13_2: C13.2 U4.4 | length 128.3
  Bottom Layer w10: C13.2@3366.14,4770.87 3370.28,4775 U4.4@3492.72,4775
NetC14_2: C14.2 U4.6 | length 139.9
  Bottom Layer w10: C14.2@3366.14,4908.66 3391.34,4908.66 3423.58,4876.42 U4.6@3492.72,4876.42
NetC15_2: C15.2 U4.2 | length 199.8
  Bottom Layer w10: U4.2@3492.72,4675 3550,4675 3588.58,4636.42 C15.2@3588.58,4548.43
NetD1_1: D1.1 P1.2 | length 230.1
  Bottom Layer w30: P1.2@3700,3149.61 D1.1@3930.12,3149.61
NetP6_3: P6.3 R6.2 | length 972.6
  Bottom Layer w10: R6.2@1965.55,3225 1973.43,3217.13 1973.43,3101.57 2025,3050 2657.09,3050 P6.3@2756.69,3149.61
NetP6_4: P6.4 R5.2 | length 1310.8
  Bottom Layer w10: R5.2@1965.55,3300 1950,3300 1925,3275 1925,3075 1975,3025 2787.99,3025 P6.4@2912.6,3149.61
NetP6_5: P6.5 R4.2 | length 1627.1
  Bottom Layer w10: R4.2@1965.55,3375 1925,3375 1900,3350 1900,3050 1950,3000 2918.9,3000 P6.5@3068.5,3149.61
NetP6_6: P6.6 R3.2 | length 1928.7
  Bottom Layer w10: R3.2@1965.55,3450 1925,3450 1875,3400 1875,3025 1925,2975 3049.8,2975 P6.6@3224.41,3149.61
NetP7_8: P7.8 R10.1 | length 249.7
  Bottom Layer w10: P7.8@3554.34,5779.88 3554.34,5695.66 3625,5625 R10.1@3625,5559.45
NetP7_9: P7.9 R9.1 | length 1346.4
  Bottom Layer w10: R9.1@3550,5559.45 3550,5650 3500,5700 3500,5900 3575,5975 4225,5975 4307.09,5892.91 P7.9@4307.09,5779.88
NetR2_2: R2.2 U1.8 | length 492.4
  Bottom Layer w10: U1.8@3495.08,4175 3550,4175 3600,4125 3600,4000 3650,3950 3809.69,3950 R2.2@3817.76,3941.93
NetR7_U_PS1_1: R7_U_PS1.1 R8_U_PS1.2 U3_U_PS1.4
NetR7_U_PS2_1: R7_U_PS2.1 R8_U_PS2.2 U3_U_PS2.4
OLED_CS: J1.8 P5.16 | length 2092.8
  Bottom Layer w10: P5.16@2238.98,4850.39 2187.5,4901.87 2187.5,4982.5 2170,5000 2100,5000 2075,5025 2075,5600 2350,5875 2350,6375 2400,6425 2593.92,6425 2645.3,6476.38 J1.8@2653.35,6476.38
OLED_DC: J1.11 P5.20 | length 2930
  Bottom Layer w10: P5.20@2238.98,4650.39 2188.58,4600 2025,4600 1975,4650 1975,5700 2250,5975 2250,6550 2350,6650 2714.96,6650 J1.11@2788.59,6576.38
OLED_MOSI: J1.7 P5.17 | length 2380.8
  Bottom Layer w10: P5.17@2138.98,4750.39 2187.5,4798.92 2187.5,4872.5 2160,4900 2100,4900 2050,4950 2050,5625 2325,5900 2325,6425 2425,6525 2694.88,6525 J1.7@2743.51,6476.38
OLED_RST: J1.12 P5.19 | length 2583.4
  Bottom Layer w10: P5.19@2138.98,4650.39 2049.61,4650.39 2000,4700 2000,5675 2275,5950 2275,6525 2375,6625 2649.8,6625 J1.12@2698.43,6576.38
OLED_SCK: J1.6 P5.15 | length 2397.9
  Top Layer w10: v1(2350,6525) 2785.04,6525 J1.6@2833.67,6476.38
  Bottom Layer w10: P5.15@2138.98,4850.39 2074.61,4850.39 2025,4900 2025,5650 2300,5925 2300,6475 v1(2350,6525)
ORANGE_LED: P5.45 R4.1 | length 114.7
  Bottom Layer w10: R4.1@2034.45,3375 2114.37,3375 P5.45@2138.98,3350.39
RED_LED: P5.46 R5.1 | length 225.4
  Bottom Layer w10: R5.1@2034.45,3300 2188.58,3300 P5.46@2238.98,3350.39
RGB: J1.3 U2.12 | length 1701.5
  Top Layer w10: v1(2625,5375) 2627.95,5377.95 J1.3@2627.95,6377.95
  Bottom Layer w10: v1(2625,5375) 2825,5175 2825,4850 2850,4825 U2.12@2900,4825 ; J1.3@2625,6375 J1.3@2627.95,6377.95
RS232_RX: P2.3 U4.13 | length 2685.1
  Bottom Layer w10: P2.3@2754.33,3700.79 2716.54,3700.79 2700,3717.32 2700,3825 2725,3850 3225,3850 3250,3875 3250,4271.72 3278.28,4300 4000,4300 4025,4325 4025,4748.21 3998.88,4774.33 U4.13@3707.28,4774.33
RS232_TX: P2.2 U4.14 | length 2658.8
  Bottom Layer w10: P2.2@2598.43,3700.79 2637.8,3700.79 2675,3737.99 2675,3850 2700,3875 3200,3875 3225,3900 3225,4300 3250,4325 3975,4325 4000,4350 4000,4725 3975,4750 3822.91,4750 3797.91,4725 U4.14@3707.28,4725
SDIO_CLK: P5.85 P7.5 R12.1 | length 2212.4
  Top Layer w10: v1(3775,5675) 4025,5425 4025,4225 4060,4190 4060,3929.37 P5.85@4138.98,3850.39
  Bottom Layer w10: R12.1@3775,5559.45 v1(3775,5675) 3775,5739.92 P7.5@3814.97,5779.88
SDIO_CMD: P5.84 P7.2 R13.1 | length 2379.7
  Top Layer w10: v1(3850,5675) 3850,5668.43 4050,5468.43 4050,4249.91 4080,4219.91 4080,4030 4110,4000 4189.37,4000 P5.84@4238.98,3950.39
  Bottom Layer w10: R13.1@3850,5559.45 v1(3850,5675) 3852.5,5672.5 4047.5,5672.5 4110.24,5735.24 P7.2@4110.24,5779.88
SDIO_CS: P5.93 P7.1 | length 3480.4
  Top Layer w10: P5.93@4138.98,3450.39 4190,3399.37 4190,3330 4160,3300 4100,3300 4020,3380 4020,4140 3975,4185 3975,5325 3650,5650 3650,5700 3670,5720 4180,5720 v1(4200,5700)
  Bottom Layer w10: v1(4200,5700) 4208.67,5708.67 P7.1@4208.67,5779.88
SDIO_D0: P5.95 P7.7 R11.1 | length 2766
  Top Layer w10: v1(3700,5675) 4000,5375 4000,4200 4040,4160 4040,3449.37 P5.95@4138.98,3350.39
  Bottom Layer w10: P7.7@3621.27,5748.34 P7.7@3621.27,5749.13 ; P7.7@3621.27,5779.88 P7.7@3621.27,5749.13 ; R11.1@3700,5559.45 v1@3700,5669.61 ; v1(3700,5675) v1@3700,5670.39 ; P7.7@3621.27,5749.13 v1@3700,5670.39 ; v1@3700,5669.61 v1@3700,5670.39 ; v1@3700,5669.61 3699.61,5670 v1@3700,5670.39
SPI_2_MOSI: P5.9 U2.13 | length 1029.3
  Bottom Layer w10: P5.9@2138.98,5150.39 2189.37,5100 2750,5100 2800,5050 2800,4825 2846.85,4778.15 U2.13@2882.28,4778.15
UART_RX: P5.74 U4.12 | length 929.8
  Bottom Layer w10: U4.12@3707.28,4822.87 4022.13,4822.87 4050,4795 4050,4450 4100,4400 4188.58,4400 P5.74@4238.98,4450.39
UART_TX: P5.73 U4.11 | length 785.7
  Bottom Layer w10: U4.11@3707.28,4872.87 4022.13,4872.87 4075,4820 4075,4514.37 P5.73@4138.98,4450.39
pads on no net: P5.6 P5.7 P5.8 P5.10 P5.11 P5.12 P5.13 P5.14 P5.21 P5.22 P5.24 P5.25 P5.26 P5.27 P5.28 P5.29 P5.30 P5.31 P5.32 P5.33 P5.34 P5.35 P5.36 P5.37 P5.38 P5.39 P5.40 P5.41 P5.42 P5.43 P5.48 P5.53 P5.54 P5.55 P5.56 P5.57 P5.58 P5.59 P5.60 P5.61 P5.62 P5.64 P5.67 P5.68 P5.69 P5.70 P5.71 P5.75 P5.76 P5.77 P5.78 P5.79 P5.80 P5.82 P5.87 P5.88 P5.89 P5.90 P5.91 P5.92 P5.94 P5.96 P5.97 P5.98 P7. P7.CD P7.WP P7.Z1 P7.Z2 U1.5 U2.1 U2.2 U2.3 U2.4 U2.5 U3_U_PS1.2 U3_U_PS1.3 U3_U_PS1.5 U3_U_PS2.2 U3_U_PS2.3 U3_U_PS2.5 U4.7 U4.8 U4.9 U4.10
copper on no net: | length 166906